# Altium PCB botonera.PcbDoc
Units mm, origin at the board's own origin, x right, y up, seen from the top; angles counter-clockwise.
Board outline 15 x 33.4 mm, 2 copper layers (Top Layer, Bottom Layer); 15 components, 5 nets, 63 pads, 0 vias.
Unrouted connection lines stored in the file: 4.
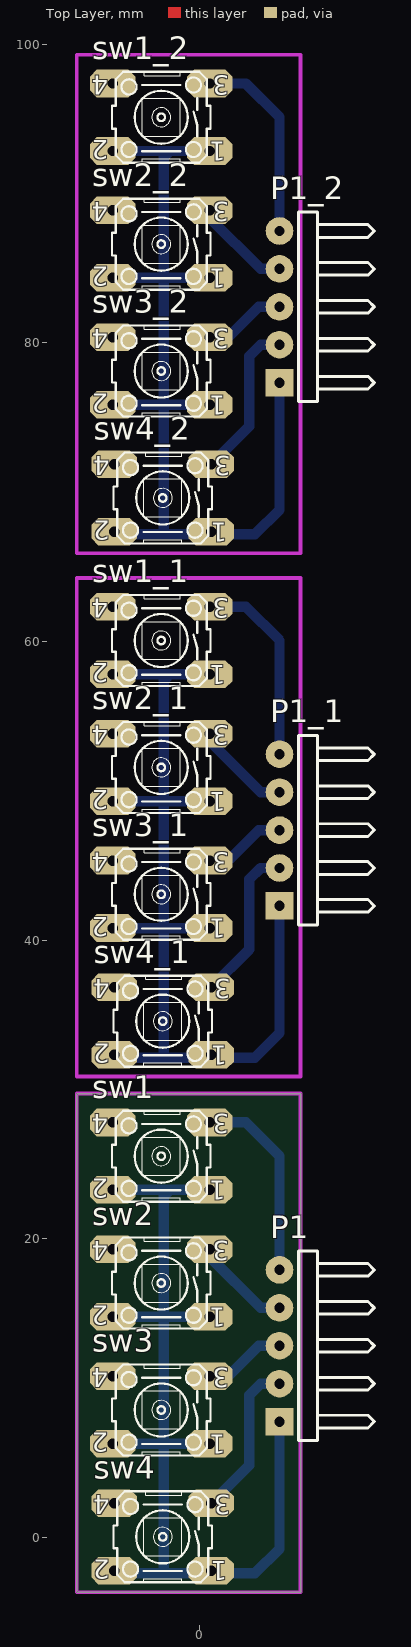
[diagram p0: Top Layer view]
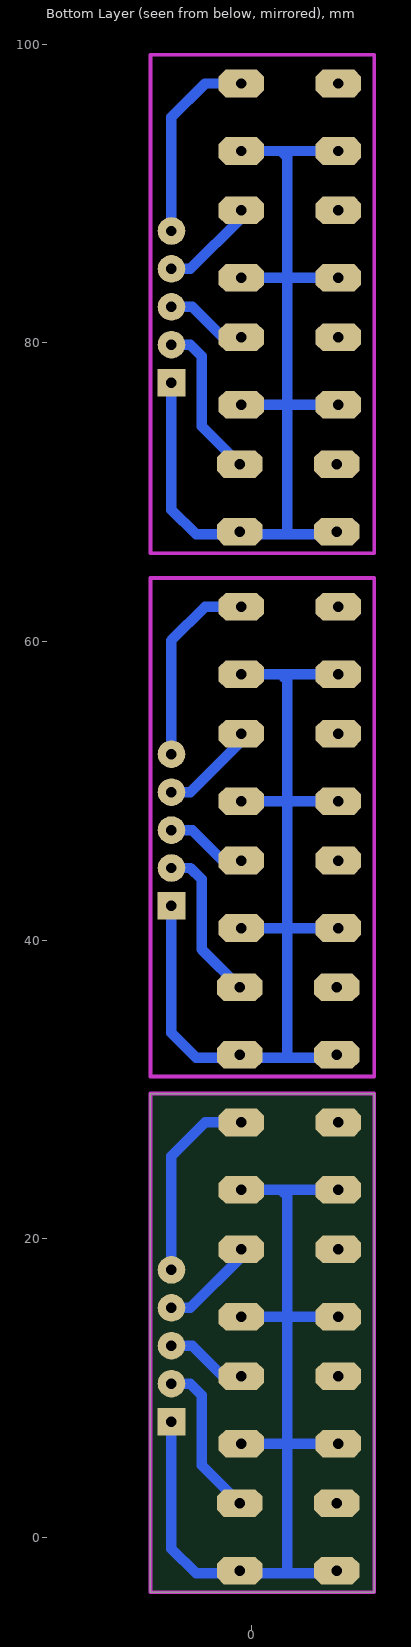
[diagram p1: Bottom Layer view, seen from below]

## Layer stack, top to bottom
Top Solder: solder mask 0.0102, Solder Resist, Dk 3.5
Top Layer: signal copper 0.0356
Dielectric 1: dielectric 0.32, FR-4, Dk 4.8
Bottom Layer: signal copper 0.0356
Bottom Solder: solder mask 0.0102, Solder Resist, Dk 3.5

## Board outline
-8.255,-3.683 -8.255,29.718 6.745,29.718 6.745,-3.683

## Design rules (kind name [scope] priority, off if disabled: settings)
Clearance [All] p1: gap=0.254
PolygonConnect [All] p1: connectstyle=Relief reliefconductorwidth=0.254 reliefentries=4 polygonreliefangle="90 Angle" airgapwidth=0.254
RoutingVias [All] p1: holewidth=0.711 width=1.27 viastyle="Through Hole" minholewidth=0.711 minwidth=1.27 maxholewidth=0.711 maxwidth=1.27
SolderMaskExpansion [All] p1: expansion=0.102
Width [All] p1: maxlimit=1 minlimit=0.254 preferedwidth=0.254
30 further rules are at their usual default settings.

## Classes and differential pairs
component class botonera: P1 sw1 sw2 sw3 sw4

## Components (designator, comment, footprint, x,y, rotation, side; value= is the part's Value field where it differs from the comment)
P1 "Header 5H" HDR1X5H 5.334,7.747 r90 top
P1_1 "Header 5H" HDR1X5H 5.334,42.291 r90 top (schematic designator P1)
P1_2 "Header 5H" HDR1X5H 5.334,77.343 r90 top (schematic designator P1)
sw1 "Tac switch" MY_TACTILE-PTH -2.642,25.5 r180 top
sw1_1 "Tac switch" MY_TACTILE-PTH -2.642,60.044 r180 top (schematic designator sw1)
sw1_2 "Tac switch" MY_TACTILE-PTH -2.642,95.096 r180 top (schematic designator sw1)
sw2 "Tac switch" MY_TACTILE-PTH -2.642,17 r180 top
sw2_1 "Tac switch" MY_TACTILE-PTH -2.642,51.544 r180 top (schematic designator sw2)
sw2_2 "Tac switch" MY_TACTILE-PTH -2.642,86.596 r180 top (schematic designator sw2)
sw3 "Tac switch" MY_TACTILE-PTH -2.642,8.5 r180 top
sw3_1 "Tac switch" MY_TACTILE-PTH -2.642,43.044 r180 top (schematic designator sw3)
sw3_2 "Tac switch" MY_TACTILE-PTH -2.642,78.096 r180 top (schematic designator sw3)
sw4 "Tac switch" MY_TACTILE-PTH -2.54,0 r180 top
sw4_1 "Tac switch" MY_TACTILE-PTH -2.54,34.544 r180 top (schematic designator sw4)
sw4_2 "Tac switch" MY_TACTILE-PTH -2.54,69.596 r180 top (schematic designator sw4)

## Footprints (in the part's own frame and the unit in brackets; to place one, negate y for a bottom-side part, rotate by r counter-clockwise, add the part's x,y. Pads: shape width x height; smd on the part's side, far side on the other; paste and mask are expansions set on the pad)
HDR1X5H [mm] "Connector; Header; 5 Position; Right Angle"
  rect 1.85x1.85 hole 0.7: 1(0,0)
  round 1.85 hole 0.7: 2(2.54,0) 3(5.08,0) 4(7.62,0) 5(10.16,0)
  silkscreen extent -1.27,-6.35 11.43,-1.27
MY_TACTILE-PTH [mil]
  oct 120x72.93 hole 27.56: 1(-130,88) 1(126,88) 2(-130,-90) 2(126,-90)
  silkscreen extent -132,-121 128,119

## Part data
P1 P1_1 P1_2: "Header, 5-Pin, Right Angle"
sw1 sw1_1 sw1_2 sw2 sw2_1 sw2_2 sw3 sw3_1 sw3_2 sw4 sw4_1 sw4_2: "small tac switch"

## Nets (pads, with @x,y where several pads share a name; then routed paths per layer and width w, separated by ;. In a path a pad name is that pad's centre, name@x,y a point inside that pad or via, vN(x,y) a via of type N, cw(c..) or ccw(c..) an arc to the next point about the centre after c; other vN are vias at no path point)
GND: P1.1 sw1.1 sw2.1 sw3.1 sw4.1 | length 65.5
  Bottom Layer w0.7: sw3.1@-5.842,6.265 -2.413,6.265 ; sw2.1@-5.842,14.765 -2.413,14.765 ; sw1.1@-5.842,23.265 sw1.1@0.66,23.265 ; sw4.1@-5.74,-2.235 -5.563,-2.413 -2.413,-2.413 ; -2.159,23.114 -2.413,22.86 -2.413,14.765 ; sw3.1@0.66,6.265 -2.413,6.265 ; sw2.1@0.66,14.765 -2.413,14.765 ; P1.1 5.334,-0.762 3.683,-2.413 -2.413,-2.413 ; -2.413,-2.413 -2.413,6.265 ; -2.413,6.265 -2.413,14.765
NetP1_2: P1.2 sw4.2 | length 10.6
  Bottom Layer w0.7: sw4.2@0.762,2.286 3.302,4.826 3.302,9.525 4.064,10.287 P1.2
NetP1_3: P1.3 sw3.2 | length 5.5
  Bottom Layer w0.7: sw3.2@0.66,10.786 1.896,10.786 3.937,12.827 P1.3
NetP1_4: P1.4 sw2.2 | length 6.6
  Bottom Layer w0.7: sw2.2@0.66,19.286 0.66,18.771 4.064,15.367 P1.4
NetP1_5: P1.5 sw1.2 | length 13.2
  Bottom Layer w0.7: sw1.2@0.66,27.786 3.075,27.786 5.334,25.527 P1.5
pads on no net: P1_1.1 P1_1.2 P1_1.3 P1_1.4 P1_1.5 P1_2.1 P1_2.2 P1_2.3 P1_2.4 P1_2.5 sw1_1.1 sw1_1.2 sw1_2.1 sw1_2.2 sw2_1.1 sw2_1.2 sw2_2.1 sw2_2.2 sw3_1.1 sw3_1.2 sw3_2.1 sw3_2.2 sw4_1.1 sw4_1.2 sw4_2.1 sw4_2.2
copper on no net: | length 202.9
  Bottom Layer w0.7: -5.842,40.809 -2.413,40.809 ; -5.842,49.309 -2.413,49.309 ; -5.842,57.809 0.66,57.809 ; -5.842,75.861 -2.413,75.861 ; -5.842,84.361 -2.413,84.361 ; -5.842,92.861 0.66,92.861 ; -5.74,32.309 -5.563,32.131 -2.413,32.131 ; -5.74,67.361 -5.563,67.183 -2.413,67.183 ; -2.159,57.658 -2.413,57.404 -2.413,49.309 ; -2.159,92.71 -2.413,92.456 -2.413,84.361 ; 0.66,40.809 -2.413,40.809 ; 0.66,45.33 1.896,45.33 3.937,47.371 5.334,47.371 ; 0.66,49.309 -2.413,49.309 ; 0.66,53.83 0.66,53.315 4.064,49.911 5.334,49.911 ; 0.66,62.33 3.075,62.33 5.334,60.071 5.334,52.451 ; 0.66,75.861 -2.413,75.861 ; 0.66,80.382 1.896,80.382 3.937,82.423 5.334,82.423 ; 0.66,84.361 -2.413,84.361 ; 0.66,88.882 0.66,88.367 4.064,84.963 5.334,84.963 ; 0.66,97.382 3.075,97.382 5.334,95.123 5.334,87.503 ; 0.762,36.83 3.302,39.37 3.302,44.069 4.064,44.831 5.334,44.831 ; 0.762,71.882 3.302,74.422 3.302,79.121 4.064,79.883 5.334,79.883 ; 5.334,42.291 5.334,33.782 3.683,32.131 -2.413,32.131 ; 5.334,77.343 5.334,68.834 3.683,67.183 -2.413,67.183 ; -2.413,32.131 -2.413,40.809 ; -2.413,40.809 -2.413,49.309 ; -2.413,67.183 -2.413,75.861 ; -2.413,75.861 -2.413,84.361

## Keep-outs
Keep-Out Layer:
  lines w0.254: -8.255,-3.683 -8.255,29.718 6.745,29.718 6.745,-3.683 -8.255,-3.683 ; -8.255,30.861 6.745,30.861 6.745,64.262 -8.255,64.262 -8.255,30.861 ; -8.255,65.913 6.745,65.913 6.745,99.314 -8.255,99.314 -8.255,65.913

## Text inside footprints (layer, text, board x,y; h text height)
sw1: Top Overlay "4" at -6.147,28.319 h1.27 r180; Top Overlay "3" at 1.981,28.319 h1.27 r180; Top Overlay "2" at -6.147,24.001 h1.27 r180; Top Overlay "1" at 1.727,23.874 h1.27 r180
sw1_1: Top Overlay "4" at -6.147,62.863 h1.27 r180; Top Overlay "3" at 1.981,62.863 h1.27 r180; Top Overlay "2" at -6.147,58.545 h1.27 r180; Top Overlay "1" at 1.727,58.418 h1.27 r180
sw1_2: Top Overlay "4" at -6.147,97.915 h1.27 r180; Top Overlay "3" at 1.981,97.915 h1.27 r180; Top Overlay "2" at -6.147,93.597 h1.27 r180; Top Overlay "1" at 1.727,93.47 h1.27 r180
sw2: Top Overlay "4" at -6.147,19.819 h1.27 r180; Top Overlay "3" at 1.981,19.819 h1.27 r180; Top Overlay "2" at -6.147,15.501 h1.27 r180; Top Overlay "1" at 1.727,15.374 h1.27 r180
sw2_1: Top Overlay "4" at -6.147,54.363 h1.27 r180; Top Overlay "3" at 1.981,54.363 h1.27 r180; Top Overlay "2" at -6.147,50.045 h1.27 r180; Top Overlay "1" at 1.727,49.918 h1.27 r180
sw2_2: Top Overlay "4" at -6.147,89.415 h1.27 r180; Top Overlay "3" at 1.981,89.415 h1.27 r180; Top Overlay "2" at -6.147,85.097 h1.27 r180; Top Overlay "1" at 1.727,84.97 h1.27 r180
sw3: Top Overlay "4" at -6.147,11.319 h1.27 r180; Top Overlay "3" at 1.981,11.319 h1.27 r180; Top Overlay "2" at -6.147,7.001 h1.27 r180; Top Overlay "1" at 1.727,6.874 h1.27 r180
sw3_1: Top Overlay "4" at -6.147,45.863 h1.27 r180; Top Overlay "3" at 1.981,45.863 h1.27 r180; Top Overlay "2" at -6.147,41.545 h1.27 r180; Top Overlay "1" at 1.727,41.418 h1.27 r180
sw3_2: Top Overlay "4" at -6.147,80.915 h1.27 r180; Top Overlay "3" at 1.981,80.915 h1.27 r180; Top Overlay "2" at -6.147,76.597 h1.27 r180; Top Overlay "1" at 1.727,76.47 h1.27 r180
sw4: Top Overlay "4" at -6.045,2.819 h1.27 r180; Top Overlay "3" at 2.083,2.819 h1.27 r180; Top Overlay "2" at -6.045,-1.499 h1.27 r180; Top Overlay "1" at 1.829,-1.626 h1.27 r180
sw4_1: Top Overlay "4" at -6.045,37.363 h1.27 r180; Top Overlay "3" at 2.083,37.363 h1.27 r180; Top Overlay "2" at -6.045,33.045 h1.27 r180; Top Overlay "1" at 1.829,32.918 h1.27 r180
sw4_2: Top Overlay "4" at -6.045,72.415 h1.27 r180; Top Overlay "3" at 2.083,72.415 h1.27 r180; Top Overlay "2" at -6.045,68.097 h1.27 r180; Top Overlay "1" at 1.829,67.97 h1.27 r180